# Altium PCB arduino-car.PcbDoc
Units mm, origin at the board's own origin, x right, y up, seen from the top; angles counter-clockwise.
Board outline 60.07 x 30.23 mm, 2 copper layers (Top Layer, Bottom Layer); 27 components, 35 nets, 127 pads, 15 vias.
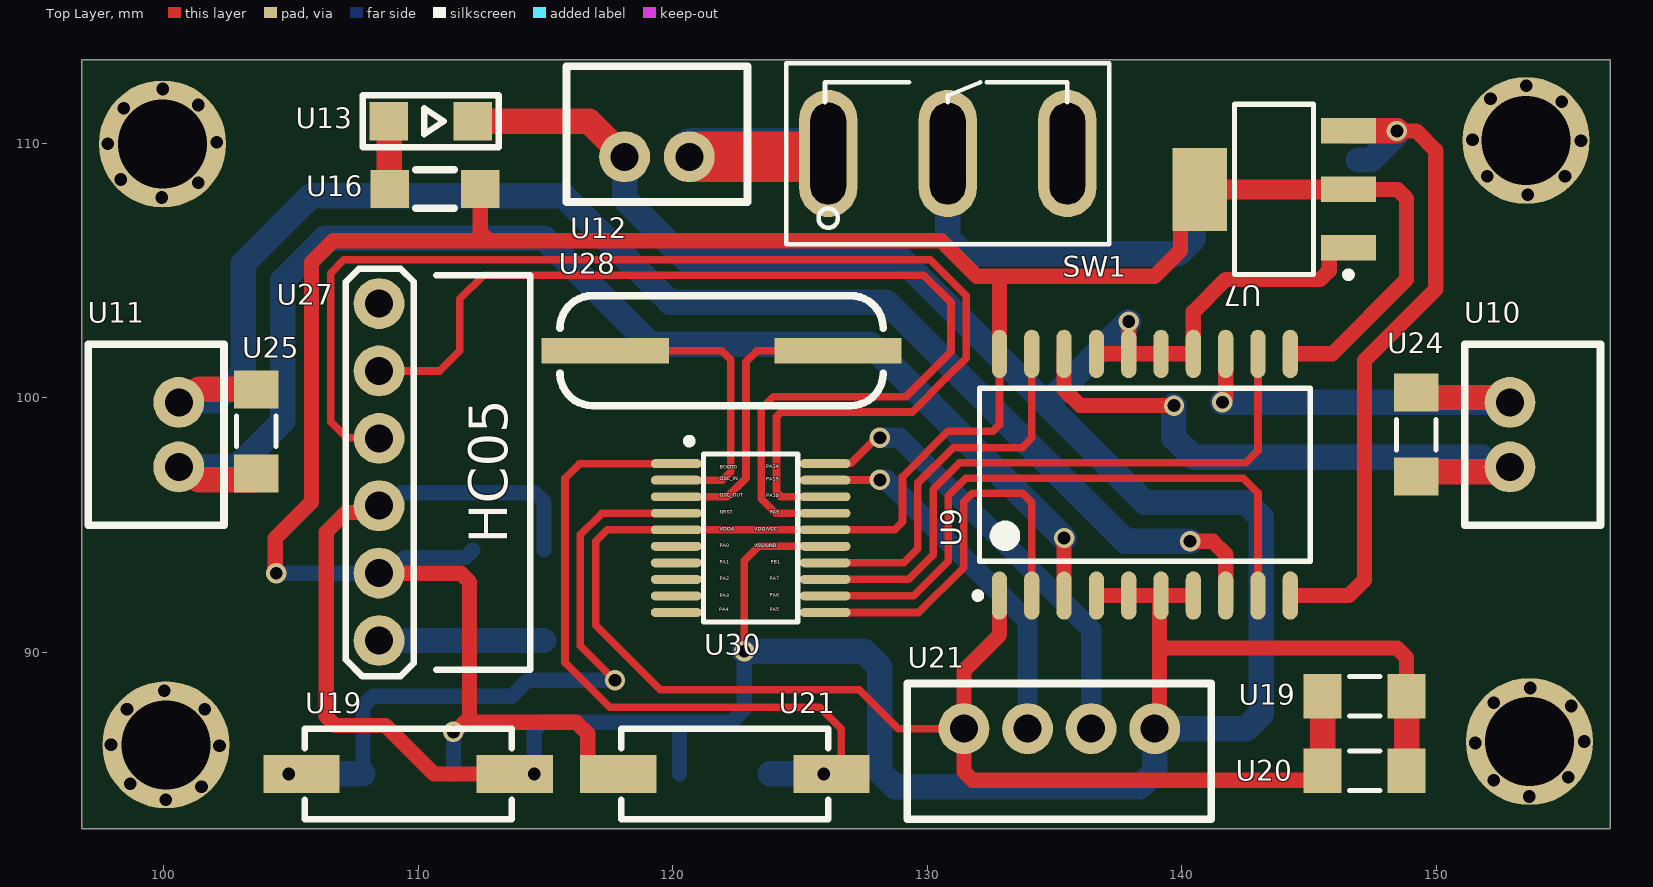
[diagram p0: Top Layer view]
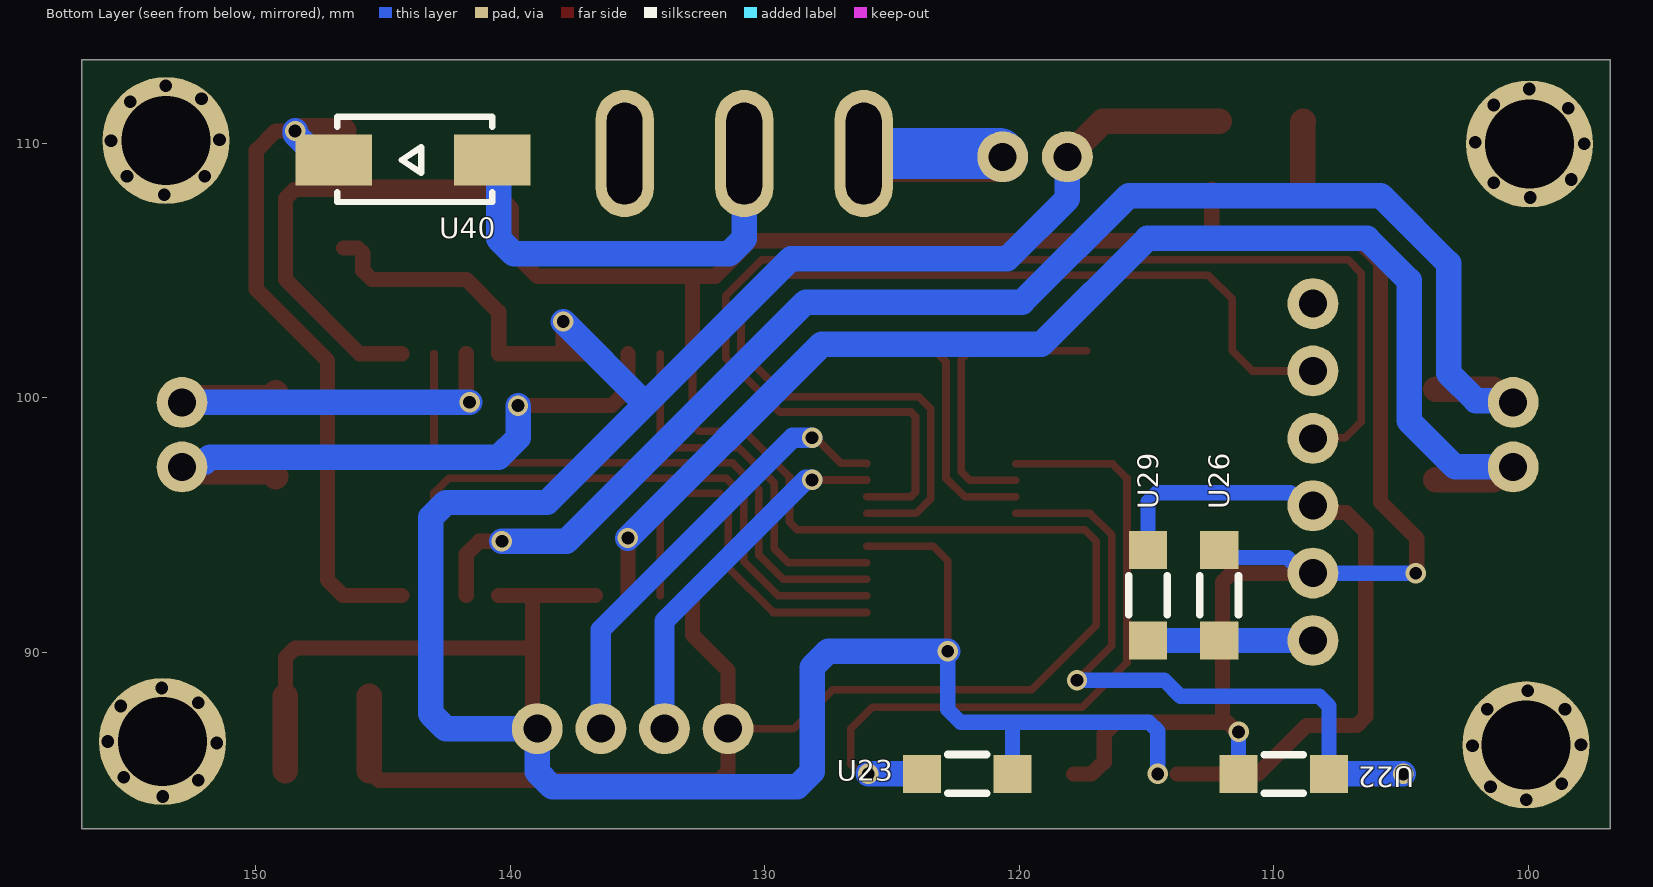
[diagram p1: Bottom Layer view, seen from below]
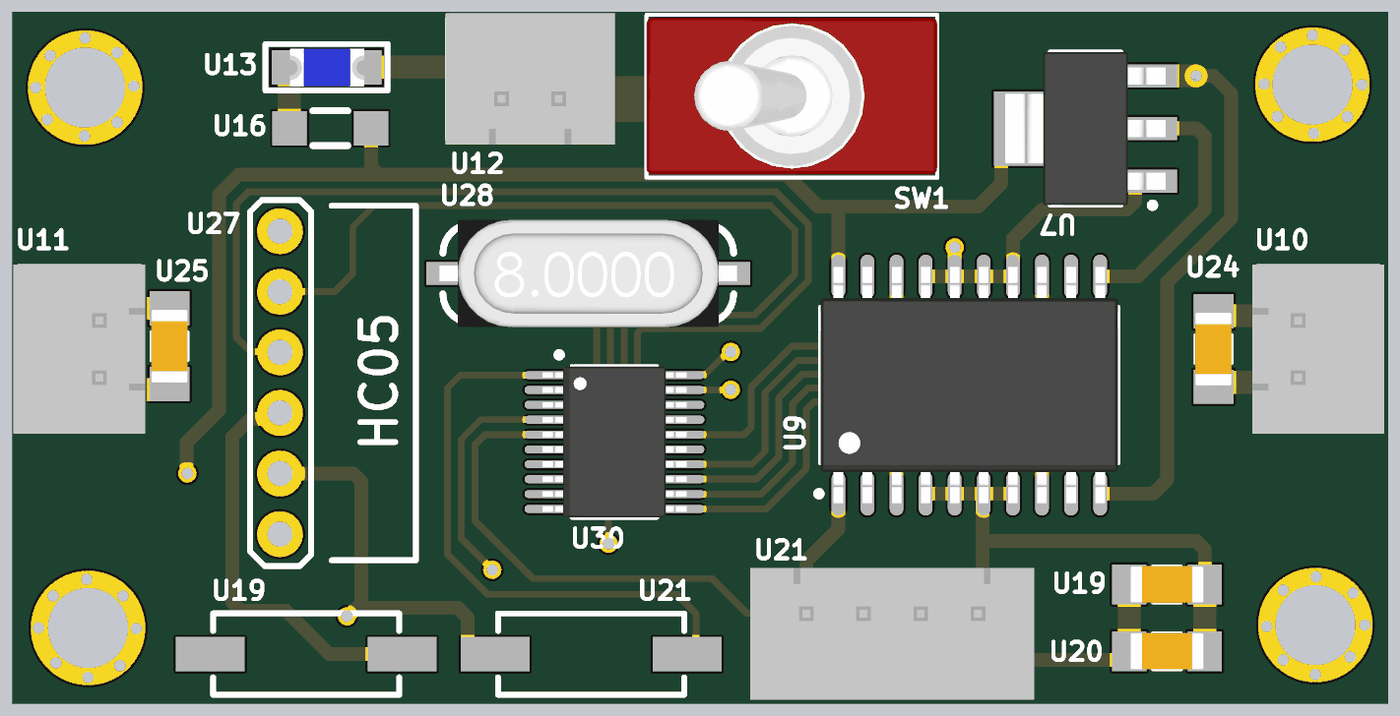
[diagram p2: 3D render of the assembled board from above, using the file's embedded part models]
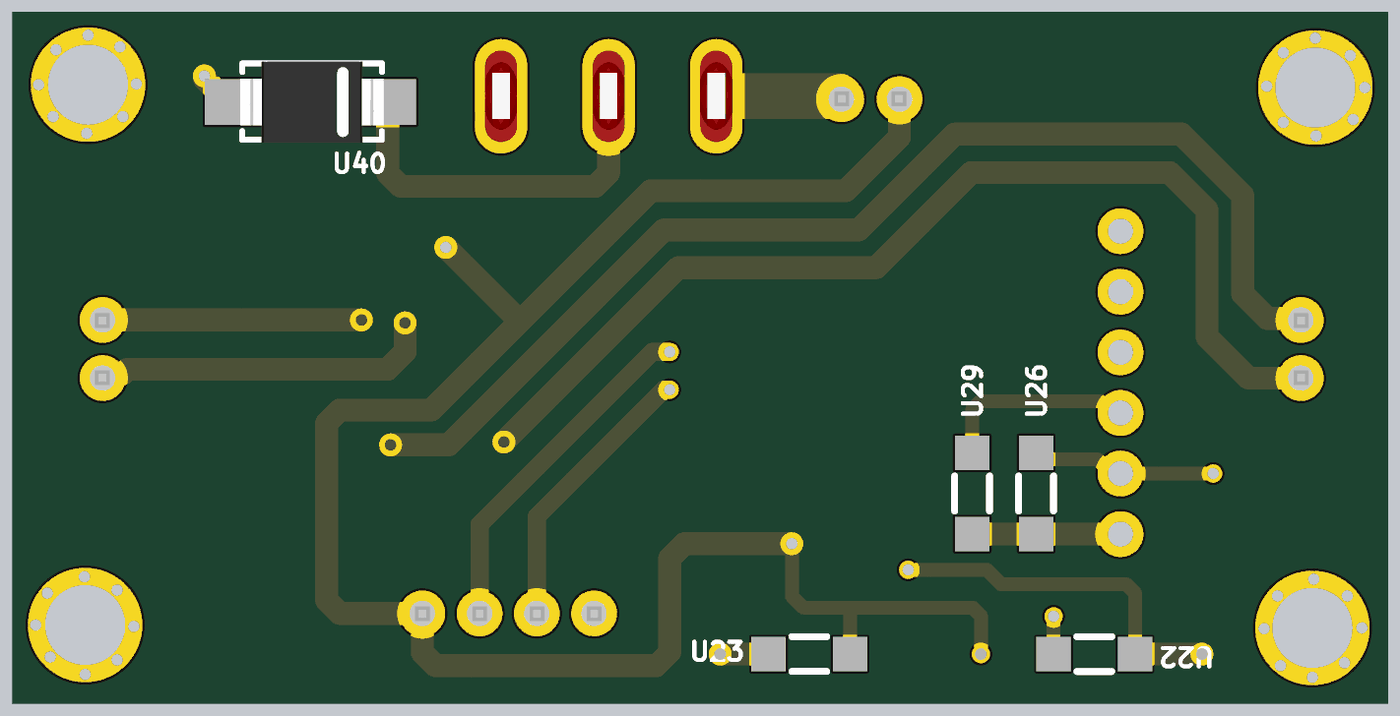
[diagram p3: 3D render of the assembled board from below, using the file's embedded part models]

## Layer stack, top to bottom
Top Solder: solder mask 0.0102, Solder Resist, Dk 3.5
Top Layer: signal copper 0.0356
Dielectric 1: dielectric 0.32, FR-4, Dk 4.8
Bottom Layer: signal copper 0.0356
Bottom Solder: solder mask 0.0102, Solder Resist, Dk 3.5

## Board outline
96.774,83.058 96.774,113.284 156.845,113.284 156.845,83.058

## Design rules (kind name [scope] priority, off if disabled: settings)
Clearance [All] p1: gap=0.3 ignorepadtopadclearanceinfootprint=FALSE
Height [All] p1 off: minheight=0 maxheight=25.4 prefheight=12.7
PolygonConnect [All] p1: connectstyle=Relief reliefconductorwidth=0.254 reliefentries=4 polygonreliefangle="90 Angle" airgapwidth=0.254
RoutingVias [All] p1: holewidth=0.8 width=0.5 viastyle="Through Hole" minholewidth=0.5 minwidth=0.6 maxholewidth=10 maxwidth=10
SolderMaskExpansion [All] p1: expansion=0.102 istentingtop=FALSE
Width [All] p1: maxlimit=10 minlimit=0.3 preferedwidth=0.3
29 further rules are at their usual default settings.

## Components (designator, comment, footprint, x,y, rotation, side; value= is the part's Value field where it differs from the comment)
SW1 "Comment" "Switch SPDT - 500x270x1100x185 mil" 130.81,109.601 r90 top
U7 "Comment" AMS1117 143.633,108.19 r180 top
U9 "Comment" L293DD 138.557,96.977 r90 top locked
U10 "Comment" "XH 2pin" 153.797,98.552 r270 top
U11 "Comment" "XH 2pin" 99.695,98.552 r90 top
U12 "Comment" "XH 2pin" 119.38,110.363 r0 top
U13 "Comment" "LED BLUE 1206" 110.49,110.871 r0 top
U16 "Comment" RES1206 110.654,108.204 r0 top
U19 "Comment" pushbutton 109.601,85.217 r180 top
U19 "Comment" CAP1206 147.193,88.265 r0 top
U20 "Comment" CAP1206 147.193,85.344 r0 top
U21 "Comment" "XH 4PIN" 135.192,86.106 r180 top
U21 "Comment" pushbutton 122.047,85.217 r0 top
U22 "Comment" RES1206 109.601,85.217 r0 bottom
U23 "Comment" RES1206 122.047,85.217 r180 bottom
U24 "Comment" CAP1206 149.225,98.552 r90 top
U25 "Comment" CAP1206 103.632,98.679 r90 top
U26 "Comment" RES1206 112.141,92.238 r90 bottom
U27 "Comment" HC05 113.758,97.066 r90 top
U28 "Comment" "Crystal Oscilator" 121.92,101.854 r0 top
U29 "Comment" RES1206 114.935,92.238 r90 bottom
U30 "Comment" STM32F030F4P6 123.063,94.488 r0 top
U40 "Comment" Diode 143.764,109.347 r0 bottom
? "Comment" SCREW 153.543,110.109 r270 top
? "Comment" SCREW 153.67,86.487 r180 top
? "Comment" SCREW 100.076,86.36 r90 top
? "Comment" SCREW 99.949,109.982 r0 top

## Footprints (in the part's own frame and the unit in brackets; to place one, negate y for a bottom-side part, rotate by r counter-clockwise, add the part's x,y. Pads: shape width x height; smd on the part's side, far side on the other; paste and mask are expansions set on the pad)
AMS1117 [mm] "SOT223, 4-Leads, Body 6.30x7.00mm (avg), Pitch 2.30mm, IPC Medium Density"
  rect 2.15x1 smd: 1(-2.925,2.3) 2(-2.925,0) 3(-2.925,-2.3)
  rect 2.15x3.25 smd: 4(2.925,0)
  silkscreen extent -3.05,-3.35 1.55,3.47, body extent -3.5,-3.35 3.5,3.35, height 1.65
CAP1206 [mm] "Chip Capacitor, 2-Leads, Body 3.20x1.60mm, IPC Medium Density"
  rect 1.5x1.75 smd: 1(-1.651,0) 2(1.651,0)
  silkscreen extent -0.6,-0.77 0.6,0.77, body extent -1.6,-0.8 1.6,0.8, height 1
"Crystal Oscilator" [mm]
  rect 5x1 smd: 1(-4.572,0) 2(4.572,0)
  silkscreen extent -6.35,-2.16 6.35,2.16, body extent -6.5,-2.35 6.5,2.35, height 4.21
Diode [mm]
  rect 3x2 smd: 1(-3.048,0) 2(3.175,0)
  silkscreen extent -3.06,-1.69 3.05,1.65, body extent -3.12,-1.78 3.12,1.78, height 2.26
HC05 [mm]
  round 2 hole 1.1: 1(-6.605,5.3) 2(-3.956,5.3) 3(-1.308,5.3) 4(1.341,5.3) 5(3.99,5.3) 6(6.639,5.3)
  silkscreen extent -8,-0.64 8,6.6, body extent -8,-1 8,5.55, height 39.5
L293DD [mm] "SOP, 20-Leads, Body 12.80x7.50mm, Pitch 1.27mm, IPC Medium Density"
  oval 1.9x0.6 smd: 1(-4.75,5.715) 2(-4.75,4.445) 3(-4.75,3.175) 4(-4.75,1.905) 5(-4.75,0.635) 6(-4.75,-0.635) 7(-4.75,-1.905) 8(-4.75,-3.175) 9(-4.75,-4.445) 10(-4.75,-5.715) 11(4.75,-5.715) 12(4.75,-4.445) 13(4.75,-3.175) 14(4.75,-1.905) 15(4.75,-0.635) 16(4.75,0.635) 17(4.75,1.905) 18(4.75,3.175) 19(4.75,4.445) 20(4.75,5.715)
  silkscreen extent -4.87,-6.5 3.4,6.69, body extent -5.16,-6.5 5.16,6.5, height 2.35
"LED BLUE 1206" [mm]
  rect 1.5x1.5 smd: 1(-1.651,0) 2(1.651,0)
  silkscreen extent -2.67,-1.02 2.67,1.02, body extent -1.61,-0.85 1.66,0.8, height 0.9
pushbutton [mm]
  rect 3x1.5 smd: 1(-4.191,0) 2(4.191,0)
  silkscreen extent -4.06,-1.78 4.06,1.78, body extent -4.17,-1.82 4.17,1.82, height 4.25
RES1206 [mm]
  rect 1.5x1.5 smd: 1(-1.778,0) 2(1.778,0)
  silkscreen extent -0.76,-0.76 0.76,0.76, body extent -1.58,-0.82 1.58,0.82, height 0.53
SCREW [mm]
  round 5 hole 3.5: 1(0,0)
  round 0 hole 0.5: ""(-2.159,0) ""(-1.651,-1.397) ""(-1.524,1.397) ""(-0.031,-2.11) ""(0,2.159) ""(1.397,1.524) ""(1.397,-1.524) ""(2.128,0.059)
STM32F030F4P6 [mm] "TSOP, 20-Leads, Body 6.50x4.40mm, Pitch 0.65mm, IPC Medium Density"
  oval 2x0.35 smd: 1(-2.925,2.925) 2(-2.925,2.275) 3(-2.925,1.625) 4(-2.925,0.975) 5(-2.925,0.325) 6(-2.925,-0.325) 7(-2.925,-0.975) 8(-2.925,-1.625) 9(-2.925,-2.275) 10(-2.925,-2.925) 11(2.925,-2.925) 12(2.925,-2.275) 13(2.925,-1.625) 14(2.925,-0.975) 15(2.925,-0.325) 16(2.925,0.325) 17(2.925,0.975) 18(2.925,1.625) 19(2.925,2.275) 20(2.925,2.925)
  silkscreen extent -2.54,-3.3 1.85,3.93, body extent -3.15,-3.3 3.15,3.3, height 1.2
"Switch SPDT - 500x270x1100x185 mil" [mm]
  oval 5x2.286 hole 1.4 slot 4 at 0 deg: 1(0,-4.699) 2(0,0) 3(0,4.699)
  silkscreen extent -3.56,-6.35 3.56,6.35, body extent -3.42,-6.35 3.44,6.35, height 28.62
"XH 2pin" [mm]
  round 2 hole 1.1: 1(-1.27,-0.889) 2(1.27,-0.889)
  silkscreen extent -3.56,-2.67 3.56,2.67, body extent -3.7,-2.88 3.7,2.88, height 7
"XH 4PIN" [mm]
  round 2 hole 1.1: 1(-3.753,-0.889) 2(-1.253,-0.889) 3(1.247,-0.889) 4(3.747,-0.889)
  silkscreen extent -5.97,-2.67 5.97,2.67, body extent -6.2,-2.88 6.2,2.88, height 7

## Via types
v1: diameter 0.8, hole 0.5, Top Layer to Bottom Layer, 15 vias

## Nets (pads, with @x,y where several pads share a name; then routed paths per layer and width w, separated by ;. In a path a pad name is that pad's centre, name@x,y a point inside that pad or via, vN(x,y) a via of type N, cw(c..) or ccw(c..) an arc to the next point about the centre after c; other vN are vias at no path point)
5V: 
12V: U7.3 U9.10 U40.2 | length 27
  Top Layer w0.6: U9.10 146.583,92.227 147.193,92.837 147.193,101.47 149.987,104.264 149.987,109.728 149.225,110.49 v1(148.463,110.49)
  Top Layer w1: U7.3 v1(148.463,110.49)
  Bottom Layer w1: U40.2 147.439,109.347 148.463,110.371 v1(148.463,110.49)
BOOT0: U21.2@126.238,85.217 U23.1 U30.1 | length 28.1
  Top Layer w0.3: U30.1 116.336,97.413 115.767,96.844 115.767,89.592 117.528,87.831 125.783,87.831 126.619,86.995 126.619,85.598 126.238,85.217 v1(125.938,85.217)
  Bottom Layer w1: U23.1 v1(125.938,85.217)
BTEN: U26.1 U27.1 U29.1 | length 6.5
  Bottom Layer w1: U27.1 U26.1 U29.1
DIR: 
DIR1: U9.2 U30.11 | length 15.4
  Top Layer w0.3: U30.11 129.669,91.563 131.432,93.326 131.432,95.907 131.769,96.244 133.753,96.244 134.112,95.885 U9.2
DIR2: U9.19 U30.14 | length 15
  Top Layer w0.3: U30.14 129.073,93.513 129.632,94.072 129.632,95.636 129.632,96.652 131.024,98.044 132.04,98.044 133.731,98.044 134.112,98.425 U9.19
GND: U7.1 U9.4 U9.5 U9.6 U9.7 U9.14 U9.15 U9.16 U9.17 U12.1 U13.2 U19.1@113.792,85.217 U19.2@148.844,88.265 U20.2 U21.1@138.945,86.995 U23.2 U27.3 U29.2 U30.15 | length 164
  Top Layer w0.3: v1(122.809,90.043) 122.809,93.599 123.373,94.163 U30.15
  Top Layer w0.6: U27.3 108.19,95.49 107.147,95.49 106.381,94.724 106.381,87.473 106.732,87.122 108.712,87.122 110.617,85.217 U19.1@113.792,85.217 ; U9.4 U9.5 U9.6 ; U9.17 U9.16 ; v1(137.922,102.997) U9.16 ; U21.1@138.945,86.995 139.135,87.185 139.135,90.17 ; U9.7 U9.6 ; U7.1 146.001,105.89 145.801,105.69 145.801,104.999 145.449,104.648 141.732,104.648 140.462,103.378 U9.14 U9.15 U9.16 ; U19.2@148.844,88.265 148.844,89.789 148.463,90.17 139.135,90.17 ; 139.135,90.17 139.135,92.17 U9.6
  Top Layer w1: U13.2 116.713,110.871 U12.1 ; U20.2 U19.2@148.844,88.265
  Bottom Layer w0.6: U27.3 108.837,95.758 109.345,96.266 114.584,96.266 114.935,95.915 U29.2 ; v1(114.554,85.217) 114.554,86.898 114.905,87.249 120.269,87.249 ; U23.2 120.269,87.249 ; v1(122.809,90.043) 122.809,87.757 122.301,87.249 120.269,87.249
  Bottom Layer w1: U12.1 118.11,107.823 120.463,105.47 128.972,105.47 134.683,99.758 ; v1(122.809,90.043) 127.508,90.043 128.143,89.408 128.143,85.295 128.729,84.709 138.359,84.709 138.945,85.295 138.945,86.995 142.543,86.995 143.129,87.581 143.129,95.299 142.543,95.885 138.557,95.885 134.683,99.758 ; v1(137.922,102.997) 134.683,99.758
LED1: U13.1 U16.1 | length 2.7
  Top Layer w1: U13.1 108.858,110.852 108.858,108.223 U16.1
LED2: 
LED3: 
LED_B: 
LED_G: 
LED_R: 
M1: 
M1_A: U9.3 U11.1 U25.1 | length 52.2
  Top Layer w0.6: U9.3 v1(135.382,94.488)
  Top Layer w1: U11.1 100.855,97.282 101.363,96.774 U25.1@103.632,96.774
  Bottom Layer w1: U11.1 102.87,97.282 104.678,99.09 104.678,104.618 106.329,106.269 114.965,106.269 119.126,102.108 127.762,102.108 v1(135.382,94.488)
M1_B: U9.8 U11.2 U25.2 | length 57.8
  Top Layer w0.6: v1(140.335,94.361) 141.224,94.361 141.732,93.853 U9.8
  Top Layer w1: U11.2 100.855,99.822 101.363,100.33 U25.2
  Bottom Layer w1: U11.2 100.653,99.891 102.05,99.891 103.124,100.965 103.124,105.283 105.791,107.95 115.697,107.95 119.888,103.759 128.397,103.759 137.795,94.361 v1(140.335,94.361)
M2: 
M2_A: U9.13 U10.1 U24.2 | length 17.1
  Top Layer w0.6: v1(141.605,99.822) 141.605,99.876 141.732,100.003 U9.13
  Top Layer w1: U24.2 149.415,100.013 152.718,100.013 U10.1
  Bottom Layer w1: v1(141.605,99.822) U10.1
M2_B: U9.18 U10.2 U24.1 | length 24.8
  Top Layer w0.6: U9.18 135.382,100.33 136.017,99.695 v1(139.7,99.695)
  Top Layer w1: U24.1 149.415,97.091 152.718,97.091 U10.2
  Bottom Layer w1: v1(139.7,99.695) 139.7,98.425 140.462,97.663 151.822,97.663 152.012,97.473 152.717,97.473 U10.2
M3: 
M4: 
OSC_IN: U28.1 U30.2 | length 11.8
  Top Layer w0.3: U28.1 121.92,101.854 122.279,101.495 122.279,97.093 121.949,96.763 U30.2
OSC_OUT: U28.2 U30.3 | length 12.8
  Top Layer w0.3: U30.3 122.148,96.113 122.879,96.844 122.879,101.416 123.317,101.854 U28.2@127.889,101.854
PWM: 
PWM1: U9.9 U30.12 | length 24.7
  Top Layer w0.3: U30.12 129.47,92.213 130.832,93.575 130.832,95.139 130.832,96.155 131.521,96.844 132.537,96.844 142.424,96.844 143.002,96.266 U9.9
PWM2: U9.12 U30.13 | length 24.4
  Top Layer w0.3: U30.13 129.272,92.863 130.232,93.823 130.232,95.388 130.232,96.404 131.272,97.444 132.288,97.444 142.529,97.444 143.002,97.917 U9.12
RST: U19.2@105.41,85.217 U22.1 U30.4 | length 26.3
  Top Layer w0.3: v1(117.729,88.9) 116.367,90.262 116.367,94.61 117.22,95.463 U30.4
  Bottom Layer w0.6: U22.1 107.823,87.884 108.204,88.265 113.665,88.265 114.3,88.9 v1(117.729,88.9)
  Bottom Layer w1: v1(104.902,85.217) U22.1
RX: U27.4 U30.18 | length 49.6
  Top Layer w0.3: U27.4 108.436,98.429 107.184,98.429 106.553,99.06 106.553,104.902 107.073,105.422 130.123,105.422 130.775,104.77 131.537,104.008 131.537,101.562 130.775,100.8 129.416,99.441 124.255,99.441 124.079,99.265 124.079,96.289 124.255,96.113 U30.18
SWCLK: U21.2@136.445,86.995 U30.20 | length 17.9
  Top Layer w0.3: U30.20 125.998,97.423 127.005,97.423 128.008,98.425 v1(128.143,98.425)
  Bottom Layer w0.8: v1(128.143,98.425) 128.905,98.425 136.445,90.885 U21.2@136.445,86.995
SWDIO: U21.3 U30.19 | length 14.5
  Top Layer w0.3: U30.19 125.994,96.769 128.138,96.769 v1(128.143,96.774)
  Bottom Layer w0.8: v1(128.143,96.774) 128.397,96.774 133.945,91.226 U21.3
TX: U27.5 U30.17 | length 42.3
  Top Layer w0.3: U27.5 110.835,101.056 111.633,101.854 111.633,103.886 112.569,104.822 129.874,104.822 130.937,103.759 130.937,101.811 129.167,100.041 124.933,100.041 123.957,100.041 123.479,99.563 123.479,98.587 123.479,96.04 124.056,95.463 U30.17
VCC: U7.2 U7.4 U9.1 U9.11 U9.20 U16.2 U19.1@145.542,88.265 U20.1 U21.1@117.856,85.217 U21.4 U22.2 U26.2 U27.2 U30.5 U30.16 | length 166.5
  Top Layer w0.3: U21.4 128.856,86.995 127.332,88.519 119.507,88.519 116.967,91.059 116.967,94.361 117.419,94.813 U30.5 U30.16 128.722,94.813 129.032,95.123 129.032,96.901 130.81,98.679 132.588,98.679 132.842,98.933 U9.20
  Top Layer w0.6: v1(104.412,93.109) 104.374,93.147 104.374,94.468 105.803,95.897 105.803,105.325 106.65,106.172 112.784,106.172 ; U27.2 111.663,93.109 112.014,92.758 112.014,87.249 ; v1(111.379,86.868) 111.433,86.868 111.814,87.249 112.014,87.249 ; U16.2 112.432,106.523 112.784,106.172 ; U21.1@117.856,85.217 117.163,85.217 116.713,85.667 116.656,85.667 116.656,86.798 116.205,87.249 112.014,87.249 ; U9.1 132.842,90.678 131.445,89.281 U21.4 131.445,85.314 131.796,84.963 145.161,84.963 U20.1 ; U9.20 132.842,104.775 ; U7.4 139.954,107.436 139.954,105.791 138.938,104.775 132.842,104.775 ; U9.11 145.923,101.727 148.844,104.648 148.844,107.839 148.493,108.19 U7.2 ; 112.784,106.172 130.556,106.172 131.953,104.775 132.842,104.775
  Top Layer w0.8: U7.4 U7.2
  Top Layer w1: U20.1 U19.1@145.542,88.265
  Bottom Layer w0.6: v1(104.412,93.109) U27.2 108.837,93.109 109.454,93.726 111.851,93.726 U26.2 ; U22.2 v1(111.379,86.868)
VIN: SW1.2 U40.1 | length 16.7
  Bottom Layer w1: SW1.2 130.81,106.25 131.396,105.664 139.876,105.664 140.462,106.25 140.462,109.093 U40.1
VINSW: SW1.3 U12.2 | length 11
  Top Layer w2: U12.2 125.984,109.474 SW1.3
  Bottom Layer w2: U12.2 120.777,109.601 SW1.3
pads on no net: ?. ?.1 SW1.1 U27.6 U30.6 U30.7 U30.8 U30.9 U30.10

## Silkscreen, mask and mechanical layers (free items; w line width, h text height)
Mechanical 1:
  the board outline again, w0.254

## Text inside footprints (layer, text, board x,y; h text height)
U27: Top Overlay "HC05" at 113.504,94.272 h1.52 r90
U30: Top Overlay "BOOT0" at 121.838,97.214 h0.15; Top Overlay "VDD/VCC" at 123.203,94.77 h0.15; Top Overlay "OSC_IN" at 121.838,96.766 h0.15; Top Overlay "OSC_OUT" at 121.838,96.113 h0.15; Top Overlay "NRST" at 121.838,95.434 h0.15; Top Overlay "VDDA" at 121.838,94.781 h0.15; Top Overlay "PA0" at 121.838,94.128 h0.15; Top Overlay "PA1" at 121.838,93.475 h0.15; Top Overlay "PA2" at 121.838,92.822 h0.15; Top Overlay "PA3" at 121.838,92.169 h0.15; Top Overlay "PA4" at 121.833,91.607 h0.15; Top Overlay "PA14" at 123.678,97.222 h0.15; Top Overlay "PA13" at 123.678,96.75 h0.15; Top Overlay "PA10" at 123.678,96.096 h0.15; Top Overlay "PA9" at 123.803,95.443 h0.15; Top Overlay "VSS/GND" at 123.203,94.118 h0.15; Top Overlay "PB1" at 123.853,93.483 h0.15; Top Overlay "PA7" at 123.803,92.83 h0.15; Top Overlay "PA6" at 123.803,92.177 h0.15; Top Overlay "PA5" at 123.803,91.607 h0.15